# EAGLE board Bosch_B (EAGLE 9.6.2)
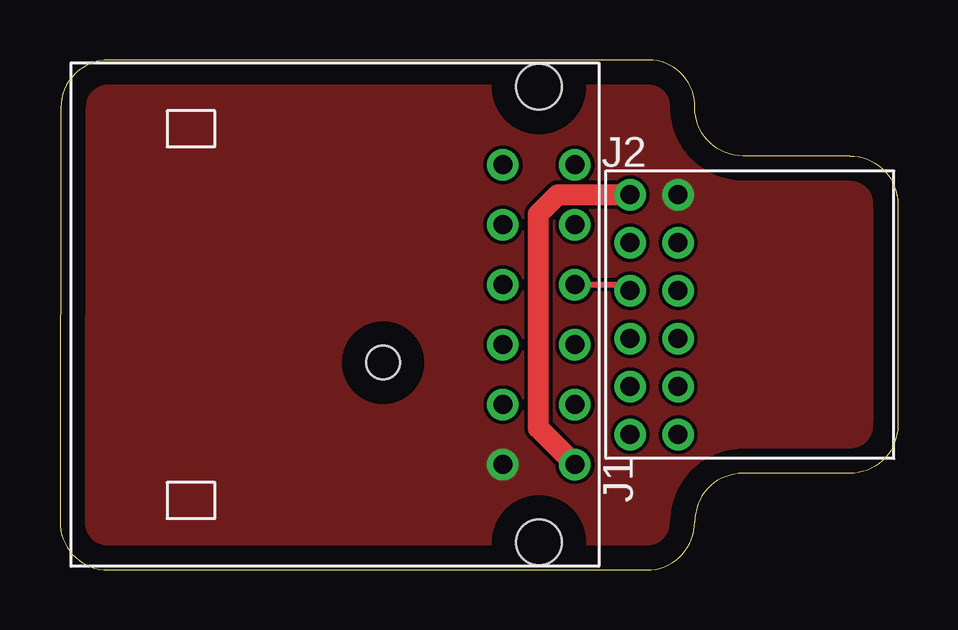
[diagram p0: board, top side]
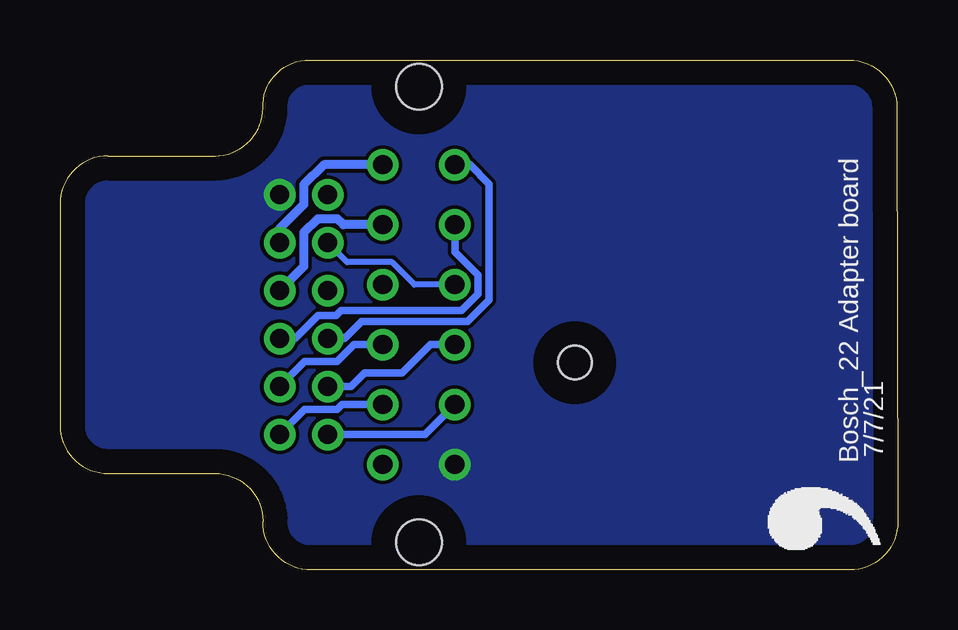
[diagram p1: board, bottom side, seen from below]

Size 34.93 x 21.27 mm. Coordinates in mm from the lower left corner, seen from the top.
Outline: 32.93,4.03 28.47,4.03 arc90 26.47,2.03 26.47,2 arc-90 24.47,0 2,0 arc-90 0,2 0.03,19.27 arc-90 2.03,21.27 24.54,21.27 arc-92 26.47,19.27 arc90 28.47,17.27 32.93,17.27 arc-90 34.93,15.27 34.93,6.03 arc-90 32.93,4.03
Copper layers (1*16): Top 0.035mm / dielectric 1.5mm / Bottom 0.035mm
Design rules "default": minimum track width 6mil, minimum drill 0.35mm, track to track 6mil, track to pad 6mil, pad to pad 6mil, via to via 6mil, smd to smd 6mil, copper to edge 40mil, drill to drill 6mil, minimum pad ring 10mil, minimum via ring 8mil, stop-mask expansion 4mil, vias tented up to drill 0mil, thermal gap 10mil

## Footprints (pad centres in the part's own frame; a part is rotated, then mirrored left to right if it is on the bottom)
MX34M12NF1 = drill 0.8: P1 6.25,0; P2 3.75,0; P3 1.25,0; P4 -1.25,0; P5 -3.75,0; P6 -6.25,0; P7 6.25,3; P8 3.75,3; P9 1.25,3; P10 -1.25,3; P11 -3.75,3; P12 -6.25,3 | hole 1.9: -9.5,1.5; 9.5,1.5 | hole 1.4: -2,8
5018761240 = drill 0.8: P1 5,-1; P2 5,1; P3 3,-1; P4 3,1; P5 1,-1; P6 1,1; P7 -1,-1; P8 -1,1; P9 -3,-1; P10 -3,1; P11 -5,-1; P12 -5,1

## Placement (x,y rotation side)
E$1  [LOGO]  0.43,0.17 90 bottom
FRAME1  FRAME-LETTER-OPENNO_PACKAGE  [DUMMY]  24.77,0.49 0 top
J1  MX34M12NF1  [MX34M12NF1]  21.47,10.65 90 top
J2  5018761240  [5018761240]  24.77,10.65 90 top

## Library data of the parts
E$1 = comma.ai
FRAME1 = comma.ai; DESIGNER: Nobody; VERSION: v01
J1 = comma.ai; CPN: CAI-HARNESS-JAE-MX34M12NF1; MPN: MX34M12NF1
J2 = 5018761440; CPN: CAI-HARNESS-MOLEX-5018761240; MPN: 5018761240

## Nets
CAN0_H: J1.P3 J2.P6
CAN0_L: J1.P9 J2.P4
GND: J1.P12 J2.P1
IGN: J1.P6 J2.P2
PT1: J1.P7 J2.P8
PT2: J1.P10 J2.P10
PT3: J1.P11 J2.P12
PT4: J1.P8 J2.P7
PT5: J1.P4 J2.P9
PT6: J1.P5 J2.P11
PT7: J1.P1 J2.P3
PT8: J1.P2 J2.P5

## Tracks (layer width: path | path; a pad name or v marks a point on that pad's centre or on a via)
CAN0_H
  Top 0.254: J1.P3 23.52,11.9 J2.P6
CAN0_L
  Bottom 0.254: J1.P9 20.15,11.9 21.08,12.83 22.95,12.83 J2.P4
GND
  pour Top (no thermals): -0.53,22.19 37.47,22.19 37.47,-0.81 -0.53,-0.81
  pour Bottom (no thermals): -1.53,23.19 36.47,23.19 36.47,-1.81 -1.53,-1.81
IGN
  Top 0.875: J1.P6 19.95,5.92 19.95,14.84 20.76,15.65 J2.P2
PT1
  Bottom 0.305: J2.P8 23.06,9.65 22.35,10.36 17.93,10.36 17.04,11.25 17.04,16.1 17.84,16.9 J1.P7
PT2
  Bottom 0.305: J1.P10 19.48,9.4 20.67,8.21 22.23,8.21 22.79,7.65 J2.P10
PT3
  Bottom 0.305: J2.P12 19.72,5.65 J1.P11
PT4
  Bottom 0.305: J2.P7 25.12,9.65 24.16,10.61 23.42,10.61 23.22,10.82 18.19,10.82 17.51,11.5 17.51,12.3 18.47,13.26 J1.P8
PT5
  Bottom 0.305: J1.P4 22.66,9.4 23.37,8.69 24.73,8.69 J2.P9
PT6
  Bottom 0.305: J1.P5 23.16,6.9 23.37,6.69 24.73,6.69 J2.P11
PT7
  Bottom 0.375: J2.P3 25.77,14.24 24.76,15.25 24.76,16.06 23.92,16.9 J1.P1
PT8
  Bottom 0.375: J2.P5 24.76,12.66 24.76,14.06 24.18,14.64 23.35,14.64 23.11,14.4 J1.P2

## Text on the board
bPlace: Bosch_22 Adapter board | 7/7/21